# Altium PCB PCB2.PcbDoc
Units mil, origin at the board's own origin, x right, y up, seen from the top; angles counter-clockwise.
Board outline 1740 x 710 mil, 2 copper layers (Top Layer, Bottom Layer); 11 components, 7 nets, 30 pads, 0 vias.
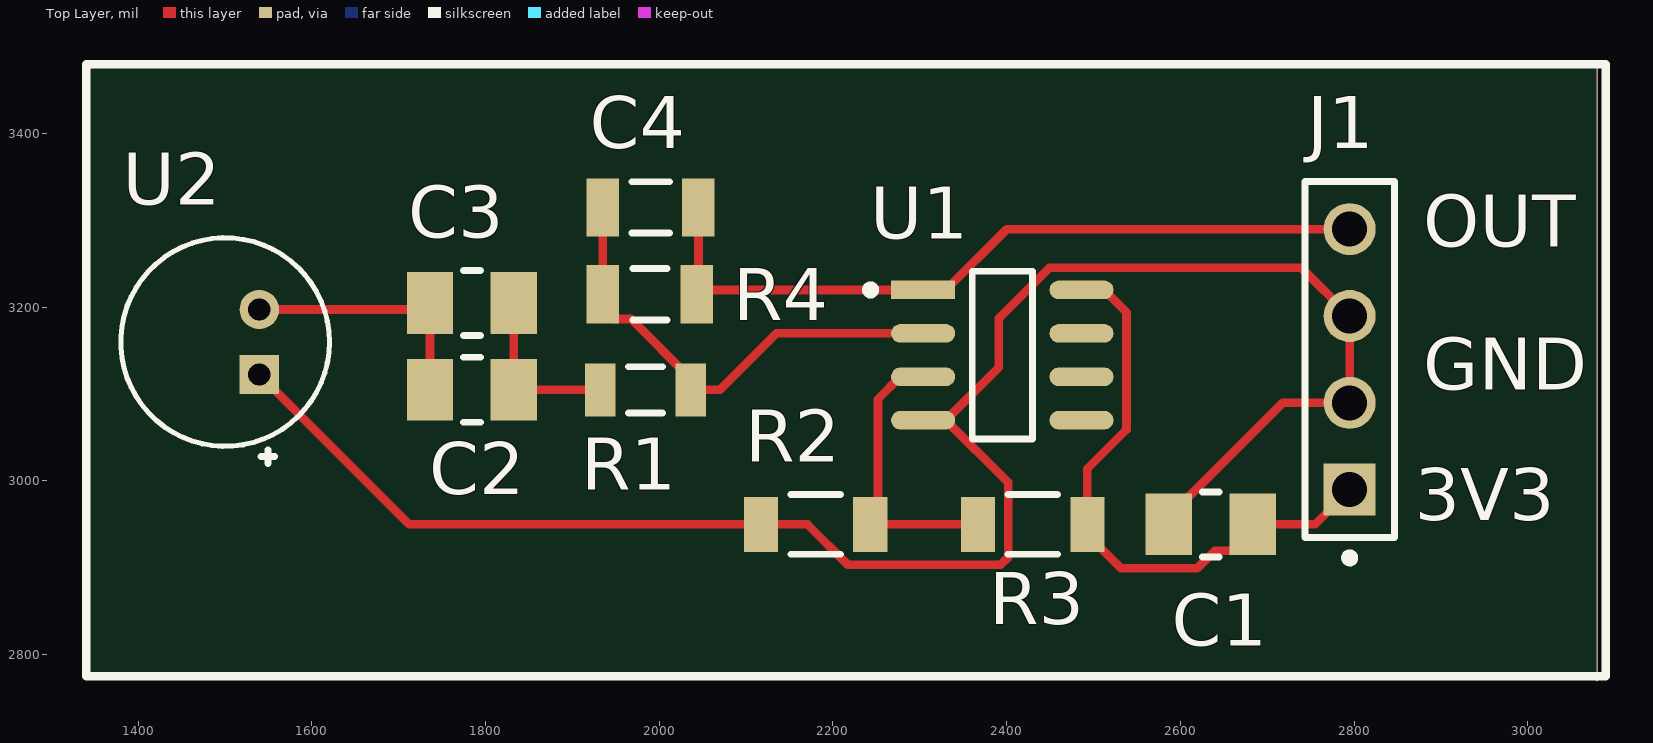
[diagram p0: Top Layer view]
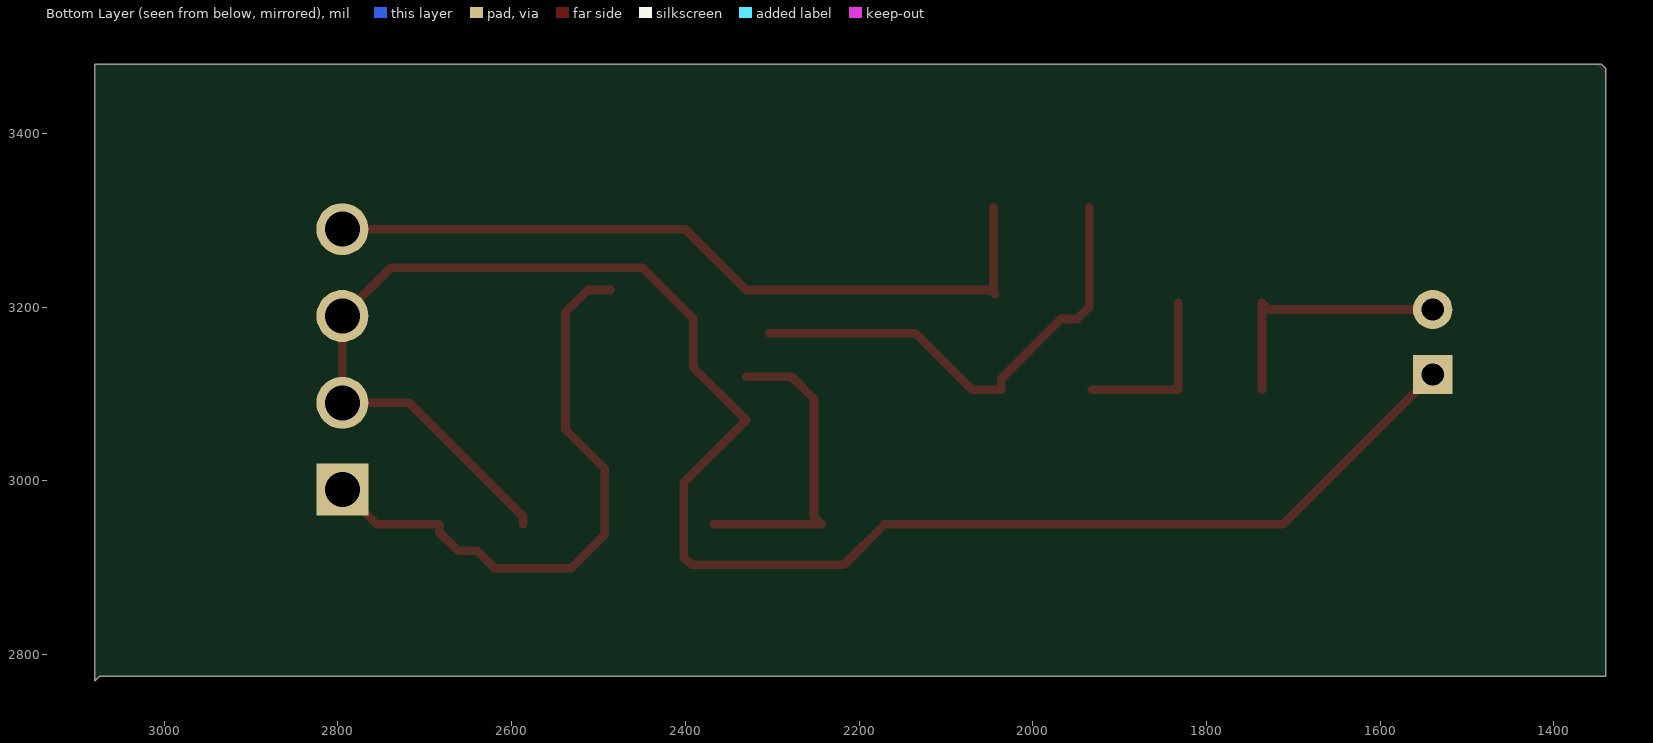
[diagram p1: Bottom Layer view, seen from below]
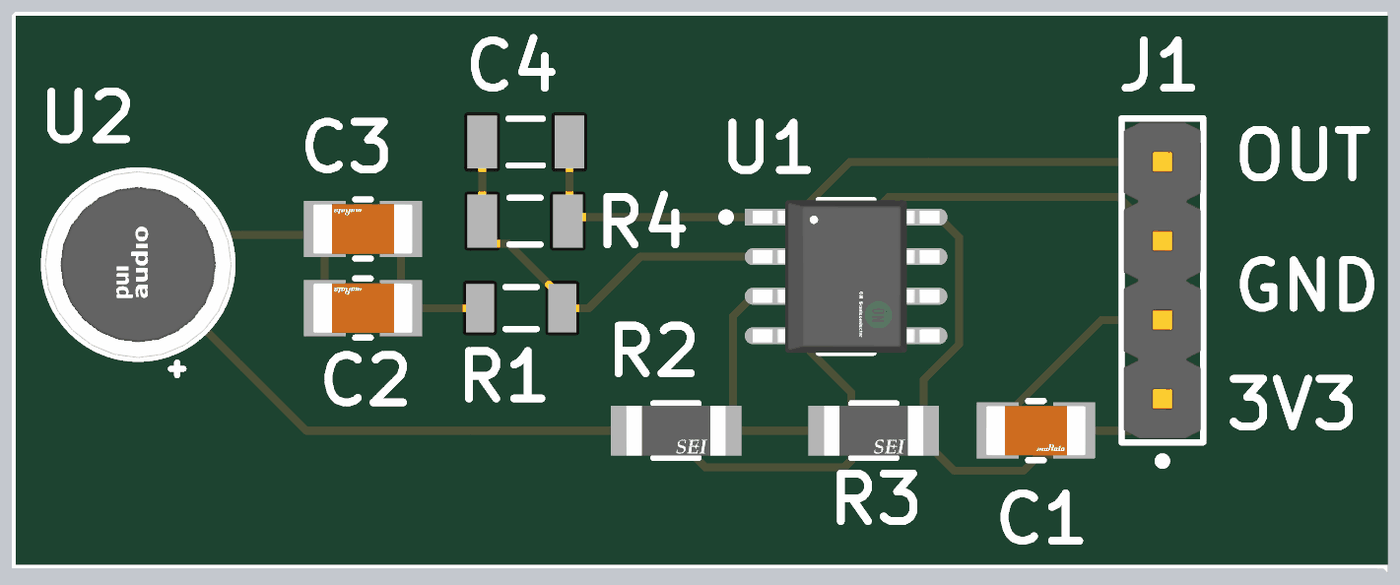
[diagram p2: 3D render of the assembled board from above, using the file's embedded part models]

## Layer stack, top to bottom
Top Solder: solder mask 0.4, Solder Resist, Dk 3.5
Top Layer: signal copper 1.4
Dielectric 1: dielectric 12.6, FR-4, Dk 4.8
Bottom Layer: signal copper 1.4
Bottom Solder: solder mask 0.4, Solder Resist, Dk 3.5

## Board outline
1340,3475 1345,3480 3080,3480 3080,2770 3075,2775 1340,2775

## Design rules (kind name [scope] priority, off if disabled: settings)
Clearance [All] p1: gap=10 ignorepadtopadclearanceinfootprint=FALSE except(0: Arc-Hole Track-Hole SMDPad-Hole THPad-Hole Via-Hole Fill-Hole Poly-Hole Region-Hole Text-Hole)
PolygonConnect [All] p1: connectstyle=Relief reliefconductorwidth=10 reliefentries=4 polygonreliefangle="90 Angle" airgapwidth=10
RoomDefinition PCB2 [InComponentClass('PCB2')] p1: confinementstyle=ConfineIn formatcopy=TRUE lockcomponents=FALSE outline 7034.13,1155 9779.13,1155 9779.13,1720 7034.13,1720
RoutingVias [All] p1: holewidth=28 width=50 viastyle="Through Hole" minholewidth=28 minwidth=50 maxholewidth=28 maxwidth=50
SolderMaskExpansion [All] p1: expansion=4 istentingtop=FALSE
Width [All] p1: maxlimit=10 minlimit=10 preferedwidth=10
30 further rules are at their usual default settings.

## Components (designator, comment, footprint, x,y, rotation, side; value= is the part's Value field where it differs from the comment)
C1 "1u" FP-GRM31C-0_3-e0_3_0_9-IPC_C 2635,2950 r0 top
C2 "1u" FP-GRM31C-0_3-e0_3_0_9-IPC_C 1784.13,3105 r180 top
C3 "1u" FP-GRM31C-0_3-e0_3_0_9-IPC_C 1784.13,3205 r180 top
C4 "33p" CAPC1206(3216)170_L 1990,3315 r0 top value=33pF
J1 "HDR" FP-MTLW-104-05-G-S-185-MFG 2795,3140 r90 top
R1 "47k" RESC3216X70X50LL05T20 1984.13,3105 r0 top
R2 "1k" FP-RMCF1206-MFG 2180,2950 r0 top
R3 "1k" FP-RMCF1206-MFG 2430,2950 r0 top
R4 "1MEG" RESC3216X70X40LL20T20 1989.13,3215 r0 top
U1 "LM358DR2G" FP-751-07-IPC_C 2395,3145 r0 top
U2 "POM-3535P-3-R" FP-POM-3535P-3-R-MFG 1500,3160 r90 top

## Footprints (in the part's own frame and the unit in brackets; to place one, negate y for a bottom-side part, rotate by r counter-clockwise, add the part's x,y. Pads: shape width x height; smd on the part's side, far side on the other; paste and mask are expansions set on the pad)
CAPC1206(3216)170_L [mm] "Chip Capacitor, Body 3.2x1.6mm, Height 1.7mm, IPC High Density"
  rect 0.95x1.7 smd: 1(-1.4,0) 2(1.4,0)
  silkscreen extent -0.55,-0.75 0.55,0.75, body extent -1.7,-0.9 1.7,0.9, height 1.7
FP-751-07-IPC_C [mil]
  rect 73.78x21.39 smd paste+0 mask+0: 1(-91.18,75)
  rrect100% 73.78x21.39 smd paste+0 mask+0: 2(-91.18,25) 3(-91.18,-25) 4(-91.18,-75) 5(91.18,-75) 6(91.18,-25) 7(91.18,25) 8(91.18,75)
  silkscreen extent -157,-96 35,96, body extent -132,-100 132,100, height 10
FP-GRM31C-0_3-e0_3_0_9-IPC_C [mil]
  rect 53.28x71.03 smd paste+0 mask+0: 1(-48.25,0) 2(48.25,0)
  silkscreen extent -10,-37 10,37, body extent -79,-41 79,41, height 10
FP-MTLW-104-05-G-S-185-MFG [mm]
  rect 1.52x1.52 hole 1.02 paste-1000 mask+0: 1(-3.81,0)
  round 1.52 hole 1.02 paste-1000 mask+0: 2(-1.27,0) 3(1.27,0) 4(3.81,0)
  silkscreen extent -5.93,-1.31 5.21,1.31, body extent -5.31,-1.41 5.31,1.41, height 0.25
FP-POM-3535P-3-R-MFG [mm]
  rect 1.15x1.15 hole 0.65 paste-1000 mask+0: 1(-0.95,-1)
  round 1.15 hole 0.65 paste-1000 mask+0: 2(0.95,-1)
  silkscreen extent -3.55,-3.05 3.05,3.05, body extent -3.15,-3.15 3.15,3.15, height 0.25
FP-RMCF1206-MFG [mm]
  rect 1x1.6 smd paste+0 mask+0: 1(-1.6,0) 2(1.6,0)
  silkscreen extent -0.72,-0.87 0.72,0.87, body extent -2.2,-0.97 2.2,0.97, height 0.25
RESC3216X70X40LL20T20 [mm] "Chip Resistor, 2-Leads, Body 3.20x1.60mm, IPC High Density"
  rect 0.95x1.7 smd: 1(-1.375,0) 2(1.375,0)
  silkscreen extent -0.5,-0.75 0.5,0.75, body extent -1.7,-0.9 1.7,0.9, height 0.7
RESC3216X70X50LL05T20 [mm] "Chip Resistor, 2-Leads, Body 3.20x1.60mm, IPC High Density"
  rect 0.9x1.55 smd: 1(-1.325,0) 2(1.325,0)
  silkscreen extent -0.5,-0.67 0.5,0.67, body extent -1.63,-0.82 1.62,0.82, height 0.7

## Part data
C1 C2 C3: library part CMP-06035-014715-1, "Chip Multilayer Ceramic Capacitors for General Purpose, 1206, 220uF, X5R, 15%, 20%, 4V", Capacitance=220uF, Case Code (Imperial)=1206, Case Code (Metric)=3216, Dielectric=X5R, Max Operating Temperature=85°C, Min Operating Temperature=-55°C, Package Quantity=2000, Tolerance=20%, Voltage Rating=4V, Case/Package=1206, Height=1.6mm, Lead Free="Lead Free", Length=0.126inch, Mount="Surface Mount", Packaging="Tape and Reel", REACH SVHC="No SVHC", Termination=SMD/SMT, Thickness=0.075inch, Voltage Rating (DC)=4V, Weight=0.001411oz, Width=1.6mm
C4: library part CMP-1037-01146-1, "CAP 33pF 100V ±2% 1206 (3216 Metric) Thickness 1.7mm SMD", Case-EIA=1206, Case-Metric=3216, Rated Voltage="100 V", Tolerance=Â±2%, Max Thickness="1.7 mm", Technology=SMT
J1: library part CMP-02766-000562-1, "CONN HEADER VERT 4POS 2.54MM", Color=Black, Contact Resistance=15mR, Max Operating Temperature=105°C, Min Operating Temperature=-40°C, Connector Type="Male Pin", Contact Material=Brass, Contact Mating Length=0.185inch, Contact Plating=Gold, Depth=2.48mm, Gender=Male, Height=6.4mm, Housing Color=Black, Housing Material=Polymer, Length=29.64mm, Mount="Through Hole", Number of Contacts=4, Number of Positions=4, Number of Rows=1, Orientation=Straight, Packaging=Rail/Tube, Pitch=2.54mm, Radiation Hardening=No, Termination=Solder
R1: library part CMP-2003-00637-1, Manufacturer=Panasonic, Part Number=ERJ-8GEYJ473V
R2 R3: library part CMP-26527-000044-1, "1kΩ ±5% 0.25W 1206 Thick Film Chip Resistor AEC-Q200 compliant", Case Code (Imperial)=1206, Case Code (Metric)=3216, Max Operating Temperature=155°C, Max Power Dissipation=250mW, Min Operating Temperature=-55°C, Resistance=1kR, Resistor Type="Thick Film", Temperature Coefficient=200ppm/°C, Tolerance=5%, Working Voltage=200V, Case/Package=1206, Construction=Rectangular, Contact Plating=Tin, Depth=1.6mm, Features="Automotive AEC-Q200", Height=0.028inch, Lead Free="Lead Free", Length=3.2mm, Military Standard=Not, Mount="Surface Mount", Number of Terminations=2, Packaging="Tape and Reel", Power Rating=250mW, Radiation Hardening=No, RoHS Compliant=Yes, Series=RMCF, Width=0.063inch
R4: library part CMP-2003-04520-1, Manufacturer="KOA Speer", Part Number=RK73B2BTTD105J
U1: library part CMP-1310-00291-2, "IC OPAMP GP 2 CIRCUIT 8SOIC", Case/Package=SOIC, Dual Supply Voltage=9V, Input Bias Current=250nA, Input Offset Voltage (Vos)=7mV, Max Dual Supply Voltage=16V, Max Operating Temperature=70°C, Max Supply Voltage=32V, Min Dual Supply Voltage=1.5V, Min Operating Temperature=0°C, Min Supply Voltage=3V, Nominal Supply Current=1.2mA, Operating Supply Current=1.5mA, Output Current=40mA, Package Quantity=2500, Power Supply Rejection Ratio (PSRR)=65dB, Voltage Gain=100dB, Bandwidth=1MHz, Common Mode Rejection Ratio=65dB, Contact Plating=Tin, Gain Bandwidth Product=1MHz, Halogen Free="Halogen Free", Height=1.5mm, Lead Free="Lead Free", Length=5mm, Number of Amplifiers=2, Number of Channels=2, Number of Circuits=2, Number of Elements=2, Number of Pins=8, Operating Supply Voltage=16V, Output Current per Channel=40mA, Packaging="Tape and Reel", Radiation Hardening=No, REACH SVHC="No SVHC", Slew Rate=0.6V/µs, Width=4mm
U2: library part CMP-231723-000001-1, "MIC COND ANALOG OMNI -35DB 6MM D", Operating Supply Current=500uA, Package Quantity=100, Resistance=2200R, Voltage Rating=2V, Depth=3.7mm, Diameter=6mm, Direction=Omnidirectional, Height=3.7mm, Impedance=2.2kR, Mount="Through Hole", Output Type=Analog, Packaging=Bulk, Shape=Round, Termination="PC Pins"

## Nets (pads, with @x,y where several pads share a name; then routed paths per layer and width w, separated by ;. In a path a pad name is that pad's centre, name@x,y a point inside that pad or via, vN(x,y) a via of type N, cw(c..) or ccw(c..) an arc to the next point about the centre after c; other vN are vias at no path point)
3V3: C1.2 J1.1 R3.2 U1.8 | length 698.1
  Top Layer w10: U1.8 2512.38,3220 2538.07,3194.3 2538.07,3059.36 2492.99,3014.27 R3.2 2492.99,2938.19 2531.7,2899.49 2619.61,2899.49 2639.61,2919.49 2661.61,2919.49 2683.25,2941.12 C1.2 2755,2950 J1.1
DCOFS: R2.2 R3.1 U1.3 | length 360.7
  Top Layer w10: U1.3@2330.01,3120 U1.3 2277.62,3120 2251.93,3094.3 2251.93,2958.93 R2.2 R3.1
GND: C1.1 J1.2 J1.3 R2.1 U1.4 U2.1 | length 2109.4
  Top Layer w10: U2.1 1711.97,2950 R2.1 2170.6,2950 2217.09,2903.5 2392.91,2903.5 2401.69,2912.29 2401.69,2998.32 2330.01,3070 2390.77,3130.76 2390.77,3187.12 2449.35,3245.7 2739.3,3245.7 J1.3 J1.2 2717.88,3090 2586.75,2958.88 C1.1
NetC2_1: C2.1 C3.1 R1.1 | length 199.6
  Top Layer w10: C3.1 C2.1 R1.1
NetC2_2: C2.2 C3.2 U2.2 | length 299.7
  Top Layer w10: U2.2 1728.29,3197.4 C3.2 C2.2
NetC4_1: C4.1 R1.2 R4.1 U1.2 | length 557.5
  Top Layer w10: C4.1 1935,3314.88 R4.1 1935,3200.24 1948.7,3186.54 1967.56,3186.54 2036.3,3117.8 R1.2 2070,3105 2135,3170 U1.2
OUT: C4.2 J1.4 R4.2 U1.1 | length 880.9
  Top Layer w10: R4.2 R4.2@2045.12,3216.85 ; C4.2 R4.2@2045.12,3216.85 ; J1.4 2400.01,3290 2330.01,3220 U1.1 2048.27,3220 R4.2@2045.12,3216.85
pads on no net: U1.5 U1.6 U1.7
copper on no net: | length 4901.2
  Top Layer w0: 1340,2775 1340,3475 1340,3470 1350,3480 3080,3480 3080,2770 3075,2775 1340,2775

## Silkscreen, mask and mechanical layers (free items; w line width, h text height)
Top Overlay:
  lines w10: 1340,2775 3090,2775 3090,3480 1340,3480 1340,2775
  text "OUT" at 2880,3270 h60
  text "GND" at 2880,3105 h60
  text "3V3" at 2870,2955 h60
Mechanical 1:
  the board outline again, w0